# Altium PCB PCB1.PcbDoc (part 3 of 3)
Units mil, origin at the board's own origin, x right, y up, seen from the top; angles counter-clockwise.
Board outline 1649.96 x 1854.5 mil, 6 copper layers (Top Layer, Layer 2, Layer 3, Layer 4, Layer 5, Bottom Layer), stack 32.112 mil thick; 86 components, 196 nets, 681 pads, 452 vias.
Unrouted connection lines stored in the file: 66.
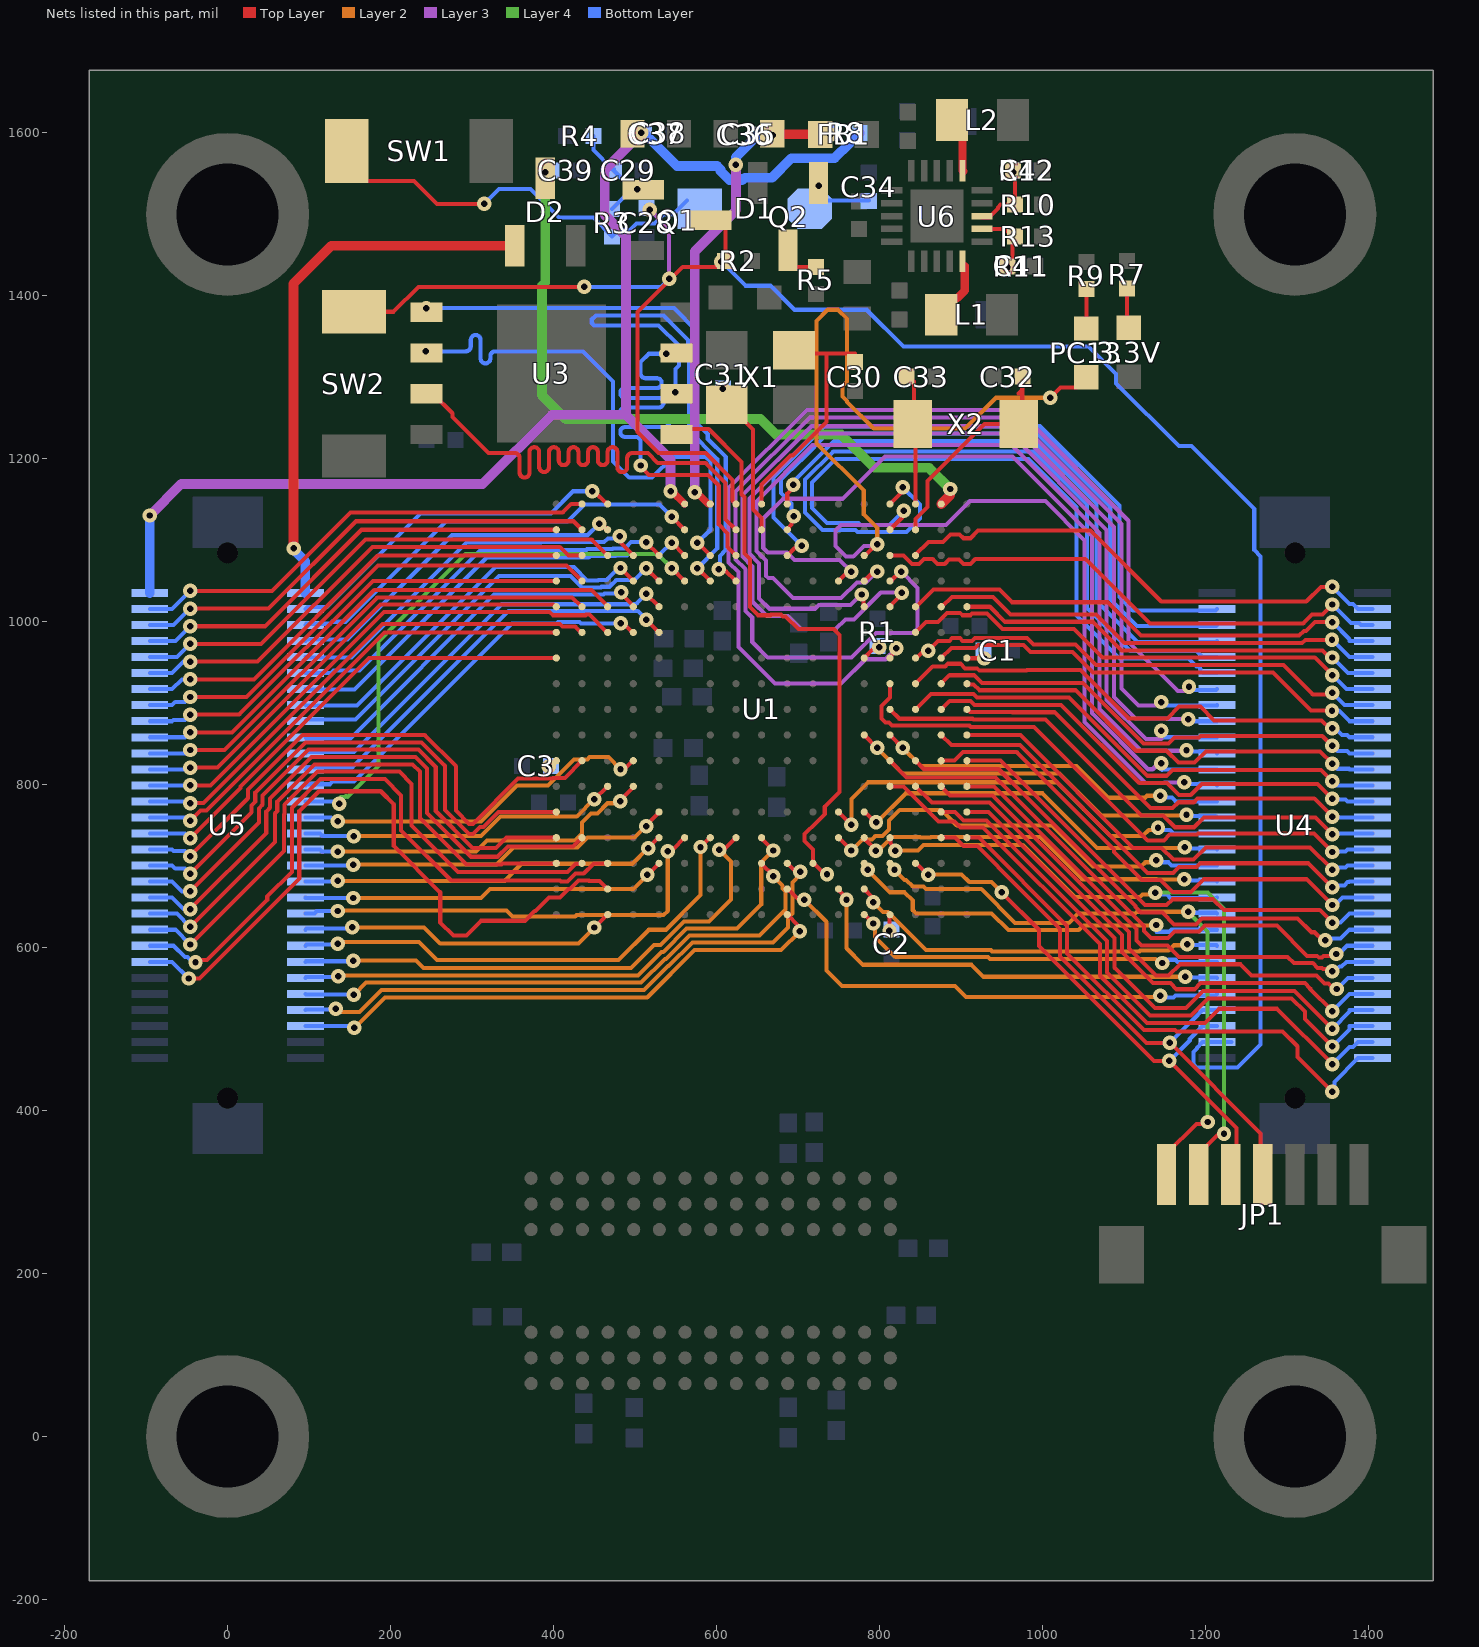
[diagram p7: the nets of this part, all layers, seen from the top]

## Via types
v1: diameter 17.7, hole 7.9, Top Layer to Bottom Layer, tented both sides, 452 vias

## Nets (pads, with @x,y where several pads share a name; then routed paths per layer and width w, separated by ;. In a path a pad name is that pad's centre, name@x,y a point inside that pad or via, vN(x,y) a via of type N, cw(c..) or ccw(c..) an arc to the next point about the centre after c; other vN are vias at no path point) (continued)
"LED / PC13": PC13.2 U1.E3 U4.35 | length 1655.8
  Top Layer w5: U1.E3@781.46,1081.47 782.51,1081.47 796.19,1095.15 v1(797.46,1095.15) ; v1(1010,1275) 1022.5,1287.5 1041.5,1287.5 PC13.2@1054,1300
  Layer 3 w5: v1(797.46,1095.15) 795.42,1093.11 781.11,1093.11 768,1080 759.24,1080 746,1093.24 746,1112 752.79,1118.79 881.79,1118.79 911,1148 1004,1148 1052,1100 1052,876.78 1126.78,802 1149.03,802 1149.88,802.85 v1(1174,802.85)
  Layer 2 w5: v1(797.46,1095.15) 797.46,1114.88 780.87,1131.47 780.87,1161.13 723,1219 723,1369.38 736.62,1383 749.34,1383 760.17,1372.17 760.17,1294.88 754.65,1289.36 754.65,1276.64 760.17,1271.12 760.17,1269.96 793.13,1237 905,1237 943,1275 v1(1010,1275)
  Bottom Layer w5: v1(1174,802.85) 1175.82,801.03 1212.71,801.03 U4.35@1214.54,799.2
NetC1_2: C1.2 U1.A7 | length 21.7
  Top Layer w5: U1.A7@907.45,955.49 907.72,955.22 928.63,955.22 v1(928.9,954.95)
NetC2_2: C2.2 U1.D17 | length 20.2
  Top Layer w5: v1(812.41,620.59) 812.69,620.86 812.69,640.25 U1.D17@812.96,640.53
NetC3_2: C3.2 U1.U11 | length 12.5
  Top Layer w5: v1(393.99,822.35) 395.31,822.35 402.47,829.5 U1.U11@403.51,829.5
NetC29_1: C29.1 Q1.1 R3.2 R4.2 | length 128.8
  Bottom Layer w5: R4.2@449,1596 449,1579 472,1556 C29.1@474,1556 ; R3.2@472,1506.46 496.54,1531 v1@502,1531 ; C29.1@474,1554 494.57,1533.43 500.57,1533.43 v1@502,1532
  other v1: 502.61,1531
NetC34_1: C34.1 D1.2 Q2.1 | length 66.5
  Top Layer w5: v1(725.4,1535.4) Q2.1@725.4,1538.68
  Bottom Layer w5: D1.2@721,1531 v1(725.4,1535.4) ; D1.2@730,1517 C34.1@787,1517
NetC41_1: C41.1 R11.2 R13.1 U6.2 | length 83.8
  Top Layer w5: U6.2@926.03,1482.25 954.02,1482.25 R13.1@962.27,1474 ; v1(957.27,1435.27) R11.2@957.27,1436 ; R11.2@957.63,1435.63 963.27,1441.27 R13.1@963.27,1473 ; R13.1@965.27,1474 R13.1@969,1474
NetC42_1: C42.1 R10.1 R12.2 U6.3 | length 97.2
  Top Layer w5: U6.3@926,1496 934.5,1496 945.62,1507.12 945.62,1508.7 948.93,1512 R10.1@966.27,1512 C42.1@966.27,1556.73 ; C42.1@963,1558 C42.1@966.27,1554.73
  other v1: 964.27,1551.73
NetD1_1: D1.1 R3.1 SW1.2 | length 501.7
  Top Layer w5: SW1.2@146.41,1578 146.41,1565.2 170.49,1541.13 228.68,1541.13 256.81,1513 v1(315,1513)
  Bottom Layer w5: v1(315,1513) 333,1531 372,1531 407,1496 449,1496 R3.1@472,1473 479.34,1480.34 493.18,1480.34 501.84,1489 524.16,1489 535,1499.84 546.84,1499.84 D1.1@564,1517
NetL1_2: L1.2 U6.20 | length 74.7
  Top Layer w10: L1.2@876,1377 876,1382.91 890.69,1397.59 895.92,1397.59 904.91,1406.57 U6.20@904.91,1436.67
NetL2_2: L2.2 U6.6 | length 62
  Top Layer w10: L2.2@888.6,1609 902.11,1595.49 902.11,1553.89 U6.6@903,1553
NetLED2_1: 3.3V.1 R7.2 | length 49.1
  Top Layer w5: R7.2@1104,1409.27 1104,1363 3.3V.1@1106,1361
NetLED3_1: PC13.1 R9.2 | length 48.3
  Top Layer w5: PC13.1@1054,1360 R9.2@1054,1408.27
NetQ2_3: Q2.3 R5.1 | length 43.4
  Top Layer w5: Q2.3@689,1451 689,1444.04 697.31,1435.73 R5.1@722,1435.73
NetR1_2: R1.2 U1.E7 | length 23.9
  Top Layer w5: U1.E7@781.46,955.49 792.48,966.5 797.32,966.5 v1(799.75,968.93)
OS_25M_IN: C31.2 U1.J2 X1.3 | length 189.4
  Top Layer w5: X1.3@602,1280 X1.3@613,1269 ; X1.3@607,1285 v1(608,1286) ; X1.3@613,1266.54 614.63,1266.54 645.05,1236.11 645.05,1138.02 655.48,1127.59 U1.J2@655.48,1112.97
  Bottom Layer w5: v1(608,1286) C31.2@608,1286.28
OS_25M_OUT: C30.2 U1.J1 X1.1 | length 296.2
  Top Layer w5: U1.J1@655.48,1144.46 655.48,1168.48 690.94,1203.94 693.97,1203.94 735,1244.96 735,1329.17 734.63,1329.54 ; X1.1@695.34,1333.46 699.26,1329.54 734.63,1329.54 ; 770,1329.54 734.63,1329.54
OS_32K_IN: C32.1 U1.C2 X2.2 | length 274.9
  Top Layer w5: U1.C2@844.46,1112.97 844.46,1126.23 859,1140.78 859,1173 929,1243 X2.2@970.96,1243 ; 970.96,1280.45 975.43,1284.92 ; X2.2@974,1240 975.43,1241.43 975.43,1284.92 ; C32.1@975.43,1301 975.43,1284.92
OS_32K_OUT: C33.1 U1.C1 X2.1 | length 147
  Top Layer w5: X2.1@835.46,1248.58 X2.1@841.04,1243 844.46,1239.58 U1.C1@844.46,1144.46 ; X2.1@842,1256 842.28,1256.28 C33.1@842.28,1295
PA0: U1.N5 U5.40 | length 521.6
  Top Layer w5: v1(513.75,1034.23) U1.N5@529.5,1018.48
  Bottom Layer w5: U5.40@95.47,838.57 96.9,840 155,840 336.5,1021.5 500.48,1021.5 501.65,1022.67 502.19,1022.67 v1(513.75,1034.23)
PA0_C: U1.T1 U5.57 | length 583.9
  Top Layer w5: v1(-46,1037.9) 54.67,1037.9 150.8,1134.04 411.36,1134.04 421.79,1144.46 U1.T1@435.01,1144.46
  Bottom Layer w5: U5.57@-95.46,1015.74 -68,1015.74 -68,1015.91 v1(-46,1037.9)
PA1: U1.N4 U5.44 | length 529.8
  Top Layer w5: v1(513.75,1065.72) U1.N4@529.5,1049.98
  Bottom Layer w5: U5.44@95.47,877.94 97.53,880 157,880 333,1056 421,1056 434.79,1042.21 458.16,1042.21 458.96,1043 468.89,1043 477.09,1051.2 499.22,1051.2 v1(513.75,1065.72)
PA1_C: U1.T2 U5.55 | length 587.5
  Top Layer w5: v1(-46,1016.2) 50.18,1016.2 157.38,1123.4 424.58,1123.4 U1.T2@435.01,1112.97
  Bottom Layer w5: U5.55@-95.46,996.05 -66.16,996.05 v1(-46,1016.2)
PA2: U1.N3 U5.50 | length 507.8
  Top Layer w5: v1(513.75,1097.85) 513.75,1097.54 529.5,1081.79 U1.N3@529.5,1081.47
  Bottom Layer w5: U5.50@95.47,937 127,937 130,940 162,940 310.22,1088.22 440.29,1088.22 441.29,1089.22 472.4,1089.22 473.04,1089.86 486.95,1089.86 488.59,1091.5 488.89,1091.5 495.24,1097.85 v1(513.75,1097.85)
PA3: U1.U2 U5.53 | length 555.6
  Top Layer w5: v1(-46,994.5) 45.7,994.5 164.16,1112.97 U1.U2@403.51,1112.97
  Bottom Layer w5: U5.53@-95.46,976.37 -64.14,976.37 v1(-46,994.5)
PA4: U1.U3 U5.47 | length 567
  Top Layer w5: v1(-46,929.4) 32.24,929.4 184.31,1081.47 U1.U3@403.51,1081.47
  Bottom Layer w5: U5.47@-95.46,917.31 -68,917.31 -55.91,929.4 v1(-46,929.4)
PA5: U1.T3 U5.49 | length 599
  Top Layer w5: v1(-46,951.1) 36.72,951.1 177.62,1092 407.73,1092 418.26,1081.47 U1.T3@435.01,1081.47
  Bottom Layer w5: U5.49@-95.46,937 -68,937 -53.89,951.1 v1(-46,951.1)
PA6: U1.R3 U5.51 | length 629.8
  Top Layer w5: v1(-46,972.8) 41.21,972.8 169.41,1101 446.98,1101 U1.R3@466.5,1081.47
  Bottom Layer w5: U5.51@-95.46,956.68 -62.13,956.68 v1(-46,972.8)
PA7: U1.R5 U5.41 | length 645.8
  Top Layer w5: v1(-46,864.3) 5.32,864.3 180.02,1039 446.74,1039 466.5,1019.23 U1.R5@466.5,1018.48
  Bottom Layer w5: U5.41@-95.46,858.26 -52.04,858.26 v1(-46,864.3)
PA8: U1.E15 U4.17 | length 488.3
  Top Layer w5: U1.E15@781.46,703.52 781.46,702.48 785.58,698.36 v1(785.58,695.57)
  Layer 2 w5: v1(785.58,695.57) 813.16,668 831,668 841.04,657.96 841.04,645.96 845,642 897.87,642 898.07,642.2 937.8,642.2 958.5,621.5 981.43,621.5 1044.76,621.5 1050.31,627.05 1139.2,627.05 v1(1140,627.85)
  Bottom Layer w5: v1(1140,627.85) 1140,619.75 1140.21,619.54 1156.35,619.54 1158.85,622.04 U4.17@1214.53,622.04
PA9: JP1.7 U1.D15 U4.19 | length 799.9
  Top Layer w5: U1.D15@812.96,703.52 812.96,702.48 818.58,696.85 v1(818.58,695.57) ; JP1.7@1152.58,321.48 1152.58,347.08 1189.08,383.57 1200.57,383.57 v1(1203,386)
  Layer 4 w5: v1(1179,644.05) 1203,620.05 v1(1203,386)
  Layer 2 w5: v1(818.58,695.57) 830.94,683.21 832.81,683.21 841.02,675 853.95,675 857.05,671.9 925.1,671.9 966.5,630.5 1032.5,630.5 1044,642 1114,642 1116.05,644.05 v1(1179,644.05)
  Bottom Layer w5: v1(1179,644.05) 1180.16,642.89 1213.37,642.89 U4.19@1214.53,641.72
PA10: JP1.6 U1.D14 U4.21 | length 865.2
  Top Layer w5: U1.D14@812.96,735.02 813.7,734.28 813.7,728.13 819.36,722.47 v1(819.36,719.03) ; JP1.6@1189.22,341.22 1189.22,344.34 1214.18,369.3 1220.57,369.3 v1(1223,371.73)
  Layer 4 w5: v1(1138.7,667.55) 1202.85,667.55 1223,647.4 v1(1223,371.73)
  Layer 2 w5: v1(819.36,719.03) 847.29,719.03 854.16,725.9 867.14,725.9 867.24,726 976,726 1040,662 1119.85,662 1122.97,665.12 1136.27,665.12 v1(1138.7,667.55)
  Bottom Layer w5: v1(1138.7,667.55) 1141.13,665.12 1153.08,665.12 1157.55,660.65 1213.78,660.65 U4.21@1214.53,661.4
PA11: U1.E17 U4.13 | length 468.7
  Top Layer w5: U1.E17@781.46,640.53 U1.E17@781.46,640.53 792.41,629.68 v1(792.5,629.68)
  Layer 2 w5: v1(792.5,629.68) 794.67,627.5 794.67,613.33 819.5,588.5 933.5,588.5 935.96,586.04 981.43,586.04 1139.01,586.04 1143.9,581.15 v1(1147.34,581.15)
  Bottom Layer w5: v1(1147.34,581.15) 1150.77,581.15 1154.79,585.17 1163.69,585.17 1166.19,582.67 U4.13@1214.53,582.67
PA12: U1.E16 U4.15 | length 472.1
  Top Layer w5: U1.E16@781.46,672.02 790.6,662.89 790.6,657.68 v1(792.7,655.57)
  Layer 2 w5: v1(792.7,655.57) 804.7,643.57 810.43,643.57 857,597 937.02,597 938.52,595.5 981.43,595.5 1119.18,595.5 1120.18,596.5 1155.18,596.5 1161.65,602.97 1176.82,602.97 v1(1178,604.15)
  Bottom Layer w5: v1(1178,604.15) 1178.9,603.25 1213.63,603.25 U4.15@1214.53,602.35
PA15: U1.A14 U4.2 | length 677.7
  Top Layer w5: U1.A14@907.45,735.02 922.28,735.02 1030.51,626.79 1030.51,592.95 1124.76,498.7 1163,498.7 1164.71,497 1295,497 1313,479 1313,465.99 v1(1356,422.99)
  Bottom Layer w5: v1(1356,422.99) 1358.43,425.42 1358.43,435.23 1387.75,464.56 U4.2@1405.47,464.56
PB0: U1.U5 U5.37 | length 583.7
  Top Layer w5: v1(-46,820.9) -12.62,820.9 187.48,1021 399.95,1021 402.47,1018.48 U1.U5@403.51,1018.48
  Bottom Layer w5: U5.37@-95.46,818.89 -48.01,818.89 v1(-46,820.9)
PB1: U1.T5 U5.39 | length 614.5
  Top Layer w5: v1(-46,842.6) -3.65,842.6 183.75,1030 422.62,1030 434.14,1018.48 U1.T5@435.01,1018.48
  Bottom Layer w5: U5.39@-95.46,838.57 -50.03,838.57 v1(-46,842.6)
PB2: U1.R6 U5.35 | length 661
  Top Layer w5: v1(-46,799.2) -20.81,799.2 191.99,1012 395.24,1012 399.19,1008.05 439.33,1008.05 440,1008.72 444.14,1008.72 465.88,986.98 U1.R6@466.5,986.98
  Bottom Layer w5: U5.35@-95.46,799.2 v1(-46,799.2)
PB3: U1.C6 U4.48 | length 611.4
  Top Layer w5: U1.C6@844.46,986.98 857.28,999.81 872.03,999.81 883.22,1011 899,1011 901.95,1008.05 911.77,1008.05 913.72,1010 931.98,1010 950.98,991 1038.73,991 1073.73,956 1334.44,956 v1(1356,934.44)
  Bottom Layer w5: v1(1356,934.44) 1373.14,917.31 U4.48@1405.47,917.31
PB4: U1.B7 U4.44 | length 575.1
  Top Layer w5: U1.B7@875.95,955.49 888.52,968.06 917.2,968.06 920.85,971.7 976.97,971.7 985.67,963 1037.27,963 1062.27,938 1283.04,938 1330,891.04 v1(1355.59,891.04)
  Bottom Layer w5: v1(1355.59,891.04) 1363.9,891.04 1377,877.94 U4.44@1405.47,877.94
PB5: U1.A5 U4.50 | length 531.8
  Top Layer w5: U1.A5@907.45,1018.48 909.21,1018.48 935.5,1018.5 954,1000 1062.27,1000 1097.27,965 1343.71,965 1352.57,956.14 v1(1356,956.14)
  Bottom Layer w5: v1(1356,956.14) 1375.15,937 U4.50@1405.47,937
PB6: U1.B5 U4.52 | length 568.3
  Top Layer w5: U1.B5@875.95,1018.48 877,1018.48 889.02,1030.5 939.5,1030.5 961,1009 1066,1009 1101,974 1319,974 1322.84,977.84 v1(1355.59,977.84)
  Bottom Layer w5: v1(1355.59,977.84) 1356.02,977.84 1371.35,962.5 1377.17,956.68 U4.52@1405.47,956.68
PB7: U1.C5 U4.54 | length 610.9
  Top Layer w5: U1.C5@844.46,1018.48 845.5,1018.48 866.57,1039.55 947.45,1039.55 963,1024 1080,1024 1121,983 1315.27,983 1321.04,988.77 1323.77,988.77 1334.54,999.54 v1(1356,999.54)
  Bottom Layer w5: v1(1356,999.54) 1377,978.55 1377,976.37 U4.54@1405.47,976.37
PB8: U1.D5 U4.43 | length 1265.8
  Top Layer w5: U1.D5@812.96,1018.48 812.96,1019.52 827.68,1034.24 v1(827.68,1035.73)
  Layer 3 w5: v1(827.68,1035.73) 801.73,1035.73 769,1003 758.39,1003 746.36,990.96 704.04,990.96 688.1,1006.9 662.1,1006.9 644,1025 644,1068.04 632,1080.04 632,1155.54 716.46,1240 964.54,1240 1088,1116.54 1088,907.78 1114.38,881.4 1152.36,881.4 1153.06,880.7 1178.7,880.7 v1(1179,880.4)
  Bottom Layer w5: v1(1179,880.4) 1179,879 1180.06,877.94 U4.43@1214.54,877.94
PB9: U1.D4 U4.45 | length 1418.5
  Top Layer w5: U1.D4@812.96,1049.98 814,1049.98 825.71,1061.68 v1(827,1061.68)
  Layer 3 w5: v1(827,1061.68) 847,1041.68 847,992 841,986 795.82,986 765.82,956 663,956 644,975 644,1005 635.5,1013.5 635.5,1064.52 623.5,1076.52 623.5,1159.77 714.73,1251 966.27,1251 1097,1120.27 1097,918 1118,897 1145.81,897 1145.81,897.7 1145.81,898.1 v1(1145.81,901.5)
  Bottom Layer w5: v1(1145.81,901.5) 1145.81,898.1 1145.81,897.7 1145.81,897.63 1146.12,897.31 1214.22,897.31 U4.45@1214.54,897.63
PB10: U1.P11 U5.32 | length 447.7
  Top Layer w5: v1(482.25,818.96) 484.68,821.39 489.24,821.39 497.36,829.5 U1.P11@498,829.5
  Layer 2 w5: v1(135,755) 311,755 355,799 393.08,799 425.08,831 441.57,831 444.38,833.81 467.4,833.81 v1(482.25,818.96)
  Bottom Layer w5: U5.32@95.47,759.83 126.73,759.83 131.56,755 v1(135,755)
PB11: U1.P12 U5.28 | length 446.3
  Top Layer w5: v1(482.16,779.6) 482.16,781.12 498,796.96 U1.P12@498,798.01
  Layer 2 w5: v1(135,718) 305,718 318.3,731.3 426.15,731.3 434.85,740 434.85,753.85 445.85,764.85 453.85,764.85 466.27,777.27 479.82,777.27 v1(482.16,779.6)
  Bottom Layer w5: U5.28@95.47,720.46 113.19,720.46 115.61,718.04 118.5,718.04 118.54,718 v1(135,718)
PB12: U1.T14 U5.21 | length 728
  Top Layer w5: v1(-46,647.3) 47.48,740.78 47.48,767.21 52,771.73 52,782.91 103.09,834 230.8,834 245,819.8 245,765.37 298.78,711.59 331.59,711.59 344,724 423.99,724 U1.T14@435.01,735.02
  Bottom Layer w5: U5.21@-95.47,661.4 -67.99,661.41 -53.89,647.3 v1(-46,647.3)
PB13: U1.U14 U5.23 | length 680
  Top Layer w5: v1(-46,669) 38.48,753.48 38.48,770.94 43,775.46 43,786.64 99.36,843 234.53,843 255.52,822.01 255.52,767.58 300.84,722.26 329.54,722.26 342.29,735.02 U1.U14@403.51,735.02
  Bottom Layer w5: U5.23@-95.46,681.09 -67.99,681.09 -55.9,669 v1(-46,669)
PB14: U1.U15 U5.19 | length 700.4
  Top Layer w5: v1(-46,625.6) 58,729.59 58,765 61,768 61,779.18 106.82,825 227.07,825 236,816.07 236,759.09 293,702.09 336.09,702.09 337.52,703.52 U1.U15@403.51,703.52
  Bottom Layer w5: U5.19@-95.47,641.72 -62.13,641.72 v1(-46,625.6)
PB15: U1.T15 U5.17 | length 744
  Top Layer w5: v1(-46,603.9) -45.1,603.9 -45.1,604.79 69,718.89 69,763.27 70,764.27 70,775.46 110.54,816 211,816 226,801 226,750 282.91,693.09 417.28,693.09 426.98,702.78 434.27,702.78 U1.T15@435.01,703.52
  Bottom Layer w5: U5.17@-95.47,622.04 -64.15,622.04 v1(-46,603.9)
PC1: U1.M2 U5.56 | length 539.7
  Top Layer w5: v1(545.24,1128.72) U1.M2@560.99,1112.97
  Bottom Layer w5: U5.56@95.47,996.05 97.03,997.61 125.61,997.61 128,1000 145,1000 268,1123 417,1123 438,1144 529.96,1144 v1(545.24,1128.72)
PC2: U1.M3 U5.48 | length 546.8
  Top Layer w5: v1(545.24,1097.22) U1.M3@560.99,1081.47
  Bottom Layer w5: U5.48@95.47,917.31 95.78,917 156,917 318.22,1079.22 443.31,1079.22 444.81,1080.72 475.92,1080.72 476.31,1081.11 490.22,1081.11 492.11,1083 531.02,1083 v1(545.24,1097.22)
PC2_C: U1.R1 U5.58 | length 437.4
  Top Layer w5: v1(447.75,1160.21) 449.71,1160.21 465.46,1144.46 U1.R1@466.5,1144.46
  Bottom Layer w5: U5.58@95.47,1015.74 97.89,1018.16 122.16,1018.16 237,1133 397,1133 424.21,1160.21 v1(447.75,1160.21)
PC3: U1.M4 U5.34 | length 701.6
  Top Layer w5: v1(545.24,1065.72) U1.M4@560.99,1049.98
  Layer 4 w5: v1(136.81,776.65) 139.24,779.08 139.24,785.08 144.25,785.08 145.29,786.12 ; v1(545.24,1065.72) 527.97,1083 292,1083 185,976 185,823 147.04,785.04 145.67,786.42 145.33,786.08 ; 145.29,786.12 145.33,786.08
  Bottom Layer w5: U5.34@95.47,779.52 130.51,779.52 133.38,776.65 v1(136.81,776.65)
PC3_C: U1.R2 U5.54 | length 433.6
  Top Layer w5: v1(456,1120.21) 458.22,1120.21 465.46,1112.97 U1.R2@466.5,1112.97
  Bottom Layer w5: U5.54@95.47,976.37 97.1,978 147,978 275.22,1106.22 442.01,1106.22 v1(456,1120.21)
PC4: U1.T4 U5.45 | length 609.3
  Top Layer w5: v1(-46,907.7) 23.27,907.7 184.57,1069 415.98,1069 U1.T4@435.01,1049.98
  Bottom Layer w5: U5.45@-95.46,897.63 -68,897.63 -64.27,901.35 -52.35,901.35 v1(-46,907.7)
PC5: U1.U4 U5.43 | length 570.2
  Top Layer w5: v1(-46,886) 14.29,886 178.27,1049.98 U1.U4@403.51,1049.98
  Bottom Layer w5: U5.43@-95.46,877.94 -68,877.94 -66.29,879.65 -52.35,879.65 v1(-46,886)
PC6: U1.F14 U4.25 | length 532.7
  Top Layer w5: U1.F14@749.97,735.02 v1(765.72,719.27)
  Layer 2 w5: v1(765.72,719.27) 779.45,733 791,733 795,737 804,737 812,745 812,756 825,769 876,769 895,750 1012,750 1062.4,699.6 1121.15,699.6 1126.37,704.82 1137.57,704.82 v1(1140,707.25)
  Bottom Layer w5: v1(1140,707.25) 1142.43,704.82 1154.81,704.82 1158.85,700.78 U4.25@1214.54,700.78
PC7: U1.F13 U4.29 | length 545.7
  Top Layer w5: U1.F13@749.97,766.51 v1(765.72,750.76)
  Layer 2 w5: v1(765.72,750.76) 765.72,782.72 786,803 1018,803 1084,737 1123.15,737 1130.67,744.52 1139.57,744.52 v1(1142,746.95)
  Bottom Layer w5: v1(1142,746.95) 1144.43,744.52 1156.48,744.52 1160.85,740.15 U4.29@1214.54,740.15
PC8: U1.E13 U4.27 | length 482.4
  Top Layer w5: U1.E13@781.46,766.51 782.35,766.51 795.05,753.81 v1(795.93,753.81)
  Layer 2 w5: v1(795.93,753.81) 796.72,753.81 832.41,789.5 1000.5,789.5 1067.4,722.6 1174.15,722.6 v1(1175,723.45)
  Bottom Layer w5: v1(1175,723.45) 1176.49,721.96 1213.04,721.96 U4.27@1214.54,720.46
PC9: U1.E14 U4.23 | length 471.2
  Top Layer w5: U1.E14@781.46,735.02 781.46,734.14 795.79,719.82 v1(795.79,718.94)
  Layer 2 w5: v1(795.79,718.94) 798.28,718.94 815.33,736 849.71,736 850.51,735.2 862.82,735.2 863.62,736 981.43,736 997,736 1049,684 1140.22,684 1140.47,683.75 v1(1174.27,683.75)
  Bottom Layer w5: v1(1174.27,683.75) 1175.6,682.42 1213.21,682.42 U4.23@1214.54,681.09
PC10: U1.A13 U4.8 | length 657.8
  Top Layer w5: U1.A13@907.45,766.51 933.91,766.51 1088.65,611.77 1088.65,575.4 1138.34,525.7 1176.14,525.7 1197.09,546.65 1309.79,546.65 v1(1356,500.44)
  Bottom Layer w5: v1(1356,500.44) 1377,521.43 1377,523.61 U4.8@1405.47,523.61
PC11: U1.B13 U4.6 | length 706.9
  Top Layer w5: U1.B13@875.95,766.51 892.7,766.51 903.13,756.08 931.61,756.08 1079.65,608.04 1079.65,569.27 1132.21,516.7 1182.47,516.7 1203.42,537.65 1306.06,537.65 1322.22,521.5 1322.22,512.52 v1(1356,478.74)
  Bottom Layer w5: v1(1356,478.74) 1377,499.73 1377,503.93 U4.6@1405.47,503.93
PC12: U1.C12 U4.10 | length 703.2
  Top Layer w5: U1.C12@844.46,798.01 864.46,778 935.15,778 1097.65,615.5 1097.65,594.55 1135.8,556.4 1157.48,556.4 1164.95,548.93 1186.64,548.93 1194.35,556.64 1322.22,556.64 1328.88,549.98 1328.88,549.27 v1(1356,522.14)
  Bottom Layer w5: v1(1356,522.14) 1377,543.13 1377,543.3 U4.10@1405.47,543.3
PD2: U1.D12 U4.4 | length 782.1
  Top Layer w5: U1.D12@812.96,798.01 829.71,798.01 872.72,755 892.19,755 899.61,747.58 927.38,747.58 1070.65,604.31 1070.65,565.54 1128.48,507.7 1199.69,507.7 1216.99,525 1288.04,525 v1(1356,457.04)
  Bottom Layer w5: v1(1356,457.04) 1377,478.03 1381.54,478.03 1387.75,484.24 U4.4@1405.47,484.24
PD3: U1.B12 U4.12 | length 661.5
  Top Layer w5: U1.B12@875.95,798.01 886.96,787 938.88,787 1106.65,619.23 1106.65,598.98 1139.83,565.8 1155.17,565.8 1169,579.63 1243.19,579.63 1257.02,565.8 1331.2,565.8 1331.36,565.64 1336.8,565.64 1346.61,555.83 1351.44,555.83 1358,549.27 v1(1361.43,549.27)
  Bottom Layer w5: v1(1361.43,549.27) 1375.15,562.98 U4.12@1405.47,562.98
PD4: U1.A12 U4.14 | length 605
  Top Layer w5: U1.A12@907.45,798.01 940.6,798.01 1115.65,622.95 1115.65,608.91 1121.86,602.7 1153.7,602.7 1167.6,588.8 1301.2,588.8 1309,581 1332,581 1337.96,575.04 1343.07,575.04 1344.5,573.61 1353.47,573.61 v1(1355.9,571.18)
  Bottom Layer w5: v1(1355.9,571.18) 1359.33,571.18 1365.07,576.92 1367.39,576.92 1373.14,582.67 U4.14@1405.47,582.67
PD5: U1.A11 U4.20 | length 590.9
  Top Layer w5: U1.A11@907.45,829.5 948.79,829.5 1126.09,652.2 1152.6,652.2 1159.8,659.4 1209.65,659.4 1223,646.05 1340.59,646.05 v1(1356,630.64)
  Bottom Layer w5: v1(1356,630.64) 1365.92,630.64 1377,641.72 U4.20@1405.47,641.72
PD6: U1.B11 U4.22 | length 630.2
  Top Layer w5: U1.B11@875.95,829.5 892.32,829.5 902.75,839.93 968.61,839.93 1087.86,720.68 1087.86,717.3 1122.26,682.9 1145.21,682.9 1159.71,668.4 1182.66,668.4 1198.26,684 1324.34,684 v1(1356,652.34)
  Bottom Layer w5: v1(1356,652.34) 1359.44,652.34 1368.5,661.41 U4.22@1405.47,661.41
PD7: U1.C11 U4.18 | length 664.5
  Top Layer w5: U1.C11@844.46,829.5 854.96,819 946.56,819 981.43,784.14 1114.25,651.32 1114.25,649.81 1120.86,643.2 1147.38,643.2 1161.88,628.7 1188.41,628.7 1195.71,636 1313.47,636 1330.53,618.94 1334.2,618.94 1343.97,609.16 v1(1347.41,609.16)
  Bottom Layer w5: v1(1347.41,609.16) 1349.54,611.29 1366.26,611.29 1377,622.04 U4.18@1405.47,622.04
PD11: U1.R15 U5.15 | length 798.8
  Top Layer w5: v1(-39.36,582.2) -36.93,584.63 -25.1,584.63 48.67,658.4 48.67,662.67 79,693 79,771.73 114.27,807 193,807 213,787 213,744 274.55,682.45 407.83,682.45 409.28,681 417.21,681 427.17,690.95 437.19,690.95 449.76,703.52 U1.R15@466.5,703.52
  Bottom Layer w5: U5.15@-95.47,602.35 -66.16,602.35 -52.36,588.55 -49.15,588.55 -42.8,582.2 v1(-39.36,582.2)
PD12: U1.R16 U5.13 | length 871.5
  Top Layer w5: v1(-47.65,562.15) -47.49,562.31 -34.69,562.31 88,685 88,768 112,792 188,792 204,776 204,725 261,668 261,631 277.05,614.95 293.15,614.95 311.2,633 365,633 377,645 377.79,645 394.38,661.59 407.83,661.59 418.26,672.02 420.26,672.02 430.69,682.45 443.38,682.45 443.83,682 456.53,682 U1.R16@466.5,672.02
  Bottom Layer w5: U5.13@-95.47,582.67 -68.18,582.67 v1(-47.65,562.15)
PD13: U1.R17 U5.18 | length 395.3
  Top Layer w5: v1(450.3,624.78) 450.53,624.78 466.28,640.53 U1.R17@466.5,640.53
  Layer 2 w5: v1(153,625) 241,625 261,605 430.53,605 v1(450.3,624.78)
  Bottom Layer w5: U5.18@95.47,622.04 96.95,623.52 151.52,623.52 v1(153,625)
PE2: U1.C3 U4.58 | length 632.7
  Top Layer w5: U1.C3@844.46,1081.47 844.46,1082.31 860.2,1098.06 878.01,1098.06 887.09,1107.14 898.53,1107.14 903.13,1102.54 911.77,1102.54 921.23,1112 1059,1112 1146,1025 1324,1025 1341.94,1042.94 v1(1356,1042.94)
  Bottom Layer w5: v1(1356,1042.94) 1377,1021.95 1381.54,1021.95 1387.75,1015.74 U4.58@1405.47,1015.74
PE3: U1.D3 U4.56 | length 661.6
  Top Layer w5: U1.D3@812.96,1081.47 829.71,1081.47 840.14,1071.04 848.78,1071.04 854.89,1077.15 865.52,1077.15 871.63,1071.04 880.27,1071.04 885.6,1076.37 897.8,1076.37 903.13,1071.04 911.77,1071.04 917.73,1077 1053,1077 1132,998 1320.27,998 1331.27,1009 1343.75,1009 v1(1356,1021.24)
  Bottom Layer w5: v1(1356,1021.24) 1378.77,998.47 1388.81,998.47 1391.24,996.05 U4.56@1405.47,996.05
PE4: U1.D2 U4.49 | length 887.4
  Top Layer w5: U1.D2@812.96,1112.97 827.48,1127.49 827.48,1133.67 v1(829.91,1136.1)
  Bottom Layer w5: v1(829.91,1136.1) 812.6,1118.79 776.86,1118.79 774.48,1121.16 735.84,1121.16 717.5,1139.5 717.5,1171.03 746.47,1200 983,1200 1042.07,1140.93 1042.07,1007.93 1095,955 1179.47,955 1189.21,945.26 1191.47,945.26 1194.4,942.33 1194.4,939.42 1196.82,937 U4.49@1214.54,937
PE5: U1.D1 U4.51 | length 970.9
  Top Layer w5: U1.D1@812.96,1144.46 826.6,1158.11 826.6,1162.9 v1(828.71,1165)
  Bottom Layer w5: v1(828.71,1165) 850,1143.71 850,1127 833.29,1110.29 773.33,1110.29 770.96,1112.66 730.34,1112.66 709,1134 709,1174.55 743.45,1209 990,1209 1055,1144 1055,1017 1108,964 1189.5,964 1196.82,956.68 U4.51@1214.54,956.68
PE6: U1.E5 U4.41 | length 1184.9
  Top Layer w5: v1(778.47,1033.47) 780.73,1031.21 780.73,1019.22 U1.E5@781.46,1018.48
  Layer 3 w5: v1(778.47,1033.47) 777.42,1033.47 764.61,1020.66 725.66,1020.66 721,1016 665.02,1016 652.5,1028.52 652.5,1071.56 640.5,1083.56 640.5,1151.32 720.18,1231 960.82,1231 1079,1112.82 1079,904.05 1127.05,856 1146,856 v1(1146,866.05)
  Bottom Layer w5: v1(1146,866.05) 1146.2,865.85 1146.2,858.2 1146.26,858.26 U4.41@1214.54,858.26
PG2: U1.H16 U4.9 | length 620.7
  Top Layer w5: U1.H16@686.98,672.02 688.02,672.02 700.07,659.97 706.84,659.97 v1(708.05,658.76)
  Layer 2 w5: v1(708.05,658.76) 735,631.81 735,572 754,553 893,553 906.4,539.6 1143.25,539.6 v1(1144.7,541.05)
  Bottom Layer w5: v1(1144.7,541.05) 1146.81,538.95 1161.05,538.95 1163.55,541.45 1212.68,541.45 U4.9@1214.53,543.3
PG3: U1.H15 U5.8 | length 732
  Top Layer w5: U1.H15@686.98,703.52 695.43,695.1 700.62,695.1 v1(702.72,693)
  Layer 2 w5: v1(133,525) 137,521 162,521 189,548 511.38,548 540.63,577.25 541.33,577.25 570.58,606.5 669.5,606.5 688,625 688,636.98 693.2,642.18 693.2,680.04 702.72,689.56 v1(702.72,693)
  Bottom Layer w5: U5.8@95.47,523.61 96.16,524.31 132.31,524.31 v1(133,525)
PG7: U1.F16 U4.11 | length 546.6
  Top Layer w5: U1.F16@749.97,672.02 749.97,670.98 759.7,661.25 v1(759.7,658.91)
  Layer 2 w5: v1(759.7,658.91) 759.7,599.3 780,579 913,579 927.72,564.28 v1(1175.36,564.28)
  Bottom Layer w5: v1(1175.36,564.28) 1176.01,563.63 1213.88,563.63 U4.11@1214.53,562.98
PG9: U1.A10 U4.26 | length 580.9
  Top Layer w5: U1.A10@907.45,861 973,861 1111.4,722.6 1146.36,722.6 1160.86,708.1 1185.81,708.1 1200.71,723 1328.74,723 v1(1356,695.74)
  Bottom Layer w5: v1(1356,695.74) 1358.43,698.17 1372.25,698.17 1374.85,700.78 U4.26@1405.47,700.78
PG10: U1.A9 U4.32 | length 562.7
  Top Layer w5: U1.A9@907.45,892.5 908.49,892.5 911.49,889.5 962.99,889.5 963.49,889 981.43,889 1015,889 1132.7,771.3 1159.97,771.3 1167.17,778.5 1185.94,778.5 1190.44,783 1333.84,783 v1(1356,760.84)
  Bottom Layer w5: v1(1356,760.84) 1357.02,759.83 U4.32@1405.47,759.83
PG11: U1.B9 U4.34 | length 596.1
  Top Layer w5: U1.B9@875.95,892.5 886.38,902.93 911.84,902.93 916.77,898 981.43,898 1023,898 1119,802 1153.14,802 1167.64,787.5 1182.21,787.5 1195.71,801 1337.54,801 v1(1356,782.54)
  Bottom Layer w5: v1(1356,782.54) 1356.53,782.02 1372.35,782.02 1374.85,779.52 U4.34@1405.47,779.52
PG12: U1.C9 U4.36 | length 621.3
  Top Layer w5: U1.C9@844.46,892.5 863.39,911.43 915.36,911.43 919.79,907 981.43,907 1033,907 1129,811 1152.72,811 1159.92,818.2 1190.24,818.2 1190.44,818 1342.24,818 v1(1356,804.24)
  Bottom Layer w5: v1(1356,804.24) 1361.04,799.2 U4.36@1405.47,799.2
PG13: U1.D9 U4.30 | length 666.6
  Top Layer w5: U1.D9@812.96,892.5 824.46,881 914.22,881 915.22,880 981.43,880 1004,880 1121.7,762.3 1148.36,762.3 1162.86,747.8 1186.21,747.8 1198.41,760 1335.14,760 v1(1356,739.14)
  Bottom Layer w5: v1(1356,739.14) 1357.01,740.15 U4.30@1405.47,740.15
PG14: U1.D8 U4.28 | length 726
  Top Layer w5: U1.D8@812.96,923.99 812.96,907.25 802.53,896.82 802.53,881.4 807.73,876.2 811.8,876.2 815.5,872.5 910.7,872.5 912.2,871 981.43,871 990,871 1129.4,731.6 1149.16,731.6 1156.36,738.8 1189.94,738.8 1191.14,740 1333.44,740 v1(1356,717.44)
  Bottom Layer w5: v1(1356,717.44) 1356.52,717.96 1372.35,717.96 1374.85,720.46 U4.28@1405.47,720.46
PH4: U1.P3 U5.52 | length 477.8
  Top Layer w5: v1(481.13,1104.74) 483.56,1102.31 483.56,1095.92 U1.P3@498,1081.47
  Bottom Layer w5: U5.52@95.47,956.68 96.15,956 152,956 293.22,1097.22 384.7,1097.22 385.2,1097.72 462.28,1097.72 466.86,1102.31 478.7,1102.31 v1(481.13,1104.74)
PH5: U1.P4 U5.46 | length 493.2
  Top Layer w5: v1(482.25,1066.05) 482.25,1065.89 498,1050.14 U1.P4@498,1049.98
  Bottom Layer w5: U5.46@95.47,897.63 96.1,897 159,897 329,1067 425,1067 441.29,1050.71 454.64,1050.71 455.44,1051.5 465.37,1051.5 479.92,1066.05 v1(482.25,1066.05)
PH6: U1.T11 U5.27 | length 710.8
  Top Layer w5: v1(-46,712.4) 25,783.39 25,794.1 91.9,861 241.98,861 280.28,822.7 280.28,768.28 296.56,752 301.01,752 356.5,807.49 398.25,807.49 399.19,808.44 413.94,808.44 U1.T11@435.01,829.5
  Bottom Layer w5: U5.27@-95.46,720.46 -67.99,720.46 -66.28,718.75 -52.35,718.75 v1(-46,712.4)
PH7: U1.U13 U5.25 | length 671
  Top Layer w5: v1(-46,690.7) 29.48,766.18 29.48,774.67 34,779.18 34,790.37 95.63,852 238.25,852 267,823.25 267,768.83 296.13,739.7 301.44,739.7 309.74,748 314,748 332.51,766.51 U1.U13@403.51,766.51
  Bottom Layer w5: U5.25@-95.46,700.78 -67.99,700.78 -64.27,697.05 -52.35,697.05 v1(-46,690.7)
PI8: U1.E4 U4.39 | length 1149.3
  Top Layer w5: U1.E4@781.46,1049.98 v1@791.06,1059.58
  Layer 3 w5: v1(797.21,1061.68) 783.85,1048.32 772.32,1048.32 753.16,1029.16 693.86,1029.16 669.52,1053.5 663.93,1053.5 661,1056.43 661,1075.08 649,1087.08 649,1147.8 718.2,1217 962.09,1217 1070,1109.09 1070,892.78 1121.08,841.7 1176.15,841.7 v1(1177,842.55)
  Bottom Layer w5: v1(1177,842.55) 1178.99,840.56 1212.55,840.56 U4.39@1214.54,838.57
PI11: U1.F4 U4.37 | length 1055.7
  Top Layer w5: U1.F4@749.97,1049.98 v1@759.14,1059.15
  Layer 3 w5: v1(765.64,1061.58) 751.22,1076 696,1076 686.93,1085.07 663.04,1085.07 657.5,1090.6 657.5,1126.5 682,1151 755,1151 807,1203 963.36,1203 1061,1105.36 1061,887.78 1129.78,819 1135.57,819 1142.92,826.35 v1(1146,826.35)
  Bottom Layer w5: v1(1146,826.35) 1146,818.7 1146.85,817.85 1147.89,818.89 U4.37@1214.54,818.89
PI12: U1.H1 U4.53 | length 744.5
  Top Layer w5: U1.H1@686.98,1144.46 686.98,1157.68 694.15,1164.85 v1(694.15,1168.29)
  Bottom Layer w5: v1(694.15,1168.29) 694.15,1171.73 740.87,1218.44 744.42,1222 989.73,1222 1066.36,1145.36 1066.36,1025.64 1117,975 1213.17,975 U4.53@1214.54,976.37
PI13: U1.H2 U4.55 | length 794.5
  Top Layer w5: U1.H2@686.98,1112.97 686.98,1114.01 692.38,1119.41 692.38,1127.2 v1(694.81,1129.63)
  Bottom Layer w5: v1(694.81,1129.63) 692.38,1132.06 692.38,1145.24 679.3,1158.32 679.3,1174.44 703.58,1198.72 704.29,1198.72 736.57,1231 993.46,1231 1083.46,1141 1083.46,1027.54 1116,995 1213.48,995 U4.55@1214.54,996.05
PI14: U1.H3 U4.57 | length 851.9
  Top Layer w5: U1.H3@686.98,1081.47 696.17,1090.67 702.5,1090.67 v1(704.93,1093.1)
  Bottom Layer w5: v1(704.93,1093.1) 670,1128.03 670,1177.16 732.84,1240 997.18,1240 1094.59,1142.59 1094.59,1030.41 1111,1014 1212.8,1014 U4.57@1214.54,1015.74
PI15: U1.P5 U5.42 | length 486.6
  Top Layer w5: v1(483.24,1036.35) 483.24,1034.28 498,1019.52 U1.P5@498,1018.48
  Bottom Layer w5: U5.42@95.47,858.26 96.73,857 151,857 327.24,1033.24 461.22,1033.24 462.48,1034.5 481.39,1034.5 v1(483.24,1036.35)
PJ0: U1.N6 U5.38 | length 525.2
  Top Layer w5: v1(513.75,1002.73) U1.N6@529.5,986.98
  Bottom Layer w5: U5.38@95.47,818.89 97.59,821 153,821 345,1013 503.48,1013 v1(513.75,1002.73)
PJ1: U1.P6 U5.36 | length 491
  Top Layer w5: v1(482.5,998.15) 485.79,998.15 496.96,986.98 U1.P6@498,986.98
  Bottom Layer w5: U5.36@95.47,799.2 96.88,800.61 125.61,800.61 129,804 129.55,804 129.75,804.2 155.2,804.2 349.15,998.15 404.11,998.15 405.81,999.85 432.19,999.85 433.89,998.15 v1(482.5,998.15)
PJ2: U1.T6 U5.33 | length 626.7
  Top Layer w5: v1(-46,777.5) -45.87,777.63 -29.65,777.63 190.13,997.41 407.83,997.41 411.01,994.23 426.72,994.23 433.96,986.98 U1.T6@435.01,986.98
  Bottom Layer w5: U5.33@-95.46,779.52 -48.01,779.52 v1(-46,777.5)
PJ3: U1.U6 U5.31 | length 596.4
  Top Layer w5: v1(-46,755.8) -33.16,768.63 -25.92,768.63 192.43,986.98 U1.U6@403.51,986.98
  Bottom Layer w5: U5.31@-95.47,759.83 -50.03,759.83 v1(-46,755.8)
PJ4: U1.U7 U5.29 | length 594.2
  Top Layer w5: v1(-46,734.1) 16,796.09 16,797.82 173.66,955.49 329.54,955.49 391.58,955.49 U1.U7@403.51,955.49
  Bottom Layer w5: U5.29@-95.46,740.15 -52.04,740.15 v1(-46,734.1)
PJ5: U1.R12 U5.30 | length 397.6
  Top Layer w5: v1(449.88,782.26) 450.32,782.26 466.06,798.01 U1.R12@466.5,798.01
  Layer 2 w5: v1(155,737) 311,737 329.54,755.54 335,761 428.62,761 v1(449.88,782.26)
  Bottom Layer w5: U5.30@95.47,740.15 113.19,740.15 115.61,737.72 117.82,737.72 118.54,737 v1(155,737)
PJ6: U1.N15 U5.22 | length 451.8
  Top Layer w5: v1(515.25,689.28) U1.N15@529.5,703.52
  Layer 2 w5: v1(154,661) 310.99,661 321.99,672 497.98,672 v1(515.25,689.28)
  Bottom Layer w5: U5.22@95.47,661.41 95.68,661.2 153.8,661.2 v1(154,661)
PJ7: U1.N14 U5.24 | length 456.4
  Top Layer w5: v1(516.13,722.28) 516.44,722.28 529.18,735.02 U1.N14@529.5,735.02
  Layer 2 w5: v1(135,682) 340,682 361,703 496.85,703 v1(516.13,722.28)
  Bottom Layer w5: U5.24@95.47,681.09 134.09,681.09 v1(135,682)
PJ8: U1.N13 U5.26 | length 462.1
  Top Layer w5: v1(513.75,749.26) 513.75,750.01 529.5,765.76 U1.N13@529.5,766.51
  Layer 2 w5: v1(154,702) 329.54,702 330,702 350.8,722.8 429.67,722.8 441.93,735.06 499.54,735.06 v1(513.75,749.26)
  Bottom Layer w5: U5.26@95.47,700.78 152.78,700.78 v1(154,702)
PJ9: U1.M14 U5.20 | length 546.3
  Top Layer w5: v1@546.53,720.55 U1.M14@560.99,735.02
  Layer 2 w5: v1(135,645) 135.65,645.65 329.54,645.65 342.35,645.65 349.5,638.5 426.74,638.5 428.24,640 535,640 540.3,645.3 v1(540.3,718.45)
  Bottom Layer w5: U5.20@95.47,641.72 106.58,641.72 109,644.15 109,645 v1(135,645)
PJ10: U1.L14 U5.16 | length 604.8
  Top Layer w5: v1(580.46,723.52) 580.73,723.52 592.22,735.02 U1.L14@592.49,735.02
  Layer 2 w5: v1(135,605) 137,607 235,607 257,585 480,585 517,622 538,622 580.46,664.46 v1(580.46,723.52)
  Bottom Layer w5: U5.16@95.47,602.35 96.79,603.68 133.68,603.68 v1(135,605)
PJ11: U1.K14 U5.14 | length 655.5
  Top Layer w5: v1(603.48,720.23) 605.59,722.33 611.3,722.33 U1.K14@623.98,735.02
  Layer 2 w5: v1(154,584) 231.45,584 240.45,575 329.54,575 495,575 523.5,603.5 531.52,603.5 560.02,632 591,632 618,659 618,705.71 v1(603.48,720.23)
  Bottom Layer w5: U5.14@95.47,582.67 96.14,583.33 153.33,583.33 v1(154,584)
PJ12: U1.D11 U4.16 | length 714.9
  Top Layer w5: U1.D11@812.96,829.5 833.46,809 942.33,809 1124.65,626.68 1124.65,620.69 1133.64,611.7 1154.41,611.7 1162.41,619.7 1192.14,619.7 1199.44,627 1288,627 1325,590 1337.4,590 1339.65,587.75 1343.08,587.75 1345.16,589.84 1358.6,589.84 v1(1361.03,592.27)
  Bottom Layer w5: v1(1361.03,592.27) 1363.98,592.27 1374.07,602.35 U4.16@1405.47,602.35
PJ13: U1.E10 U4.31 | length 475.7
  Top Layer w5: U1.E10@781.46,861 v1(797.21,845.25)
  Layer 2 w5: v1(797.21,845.25) 828.46,814 1021,814 1072.7,762.3 1176.15,762.3 v1(1177,763.15)
  Bottom Layer w5: v1(1177,763.15) 1178.66,761.49 1212.87,761.49 U4.31@1214.53,759.83
PJ14: U1.D10 U4.33 | length 437.5
  Top Layer w5: U1.D10@812.96,861 v1(828.71,845.25)
  Layer 2 w5: v1(828.71,845.25) 850.96,823 1042,823 1081,784 1126.15,784 1128.65,786.5 1144.85,786.5 v1(1145,786.65)
  Bottom Layer w5: v1(1145,786.65) 1147.43,784.22 1159.15,784.22 1163.85,779.52 U4.33@1214.54,779.52
PJ15: U1.B10 U4.24 | length 619.6
  Top Layer w5: U1.B10@875.95,861 888.32,848.63 972.64,848.63 1129.37,691.9 1160.72,691.9 1167.92,699.1 1189.54,699.1 1194.08,703.64 1326.4,703.64 v1(1356,674.04)
  Bottom Layer w5: v1(1356,674.04) 1358.43,676.47 1370.94,676.47 1374.85,680.39 1376.3,680.39 1377,681.09 U4.24@1405.47,681.09
PK0: U1.J14 U5.12 | length 690.7
  Top Layer w5: U1.J14@655.48,735.02 655.48,734.17 669.53,720.12 v1(669.53,719.27)
  Layer 2 w5: v1(136,565) 137,566 503.92,566 532.67,594.75 534.79,594.75 563.54,623.5 625.5,623.5 655,653 655,704.74 v1(669.53,719.27)
  Bottom Layer w5: U5.12@95.47,562.98 96.48,563.99 134.99,563.99 v1(136,565)
PK1: U1.J15 U5.10 | length 702.1
  Top Layer w5: U1.J15@655.48,703.52 655.48,702.77 669.85,688.4 v1(669.85,687.65)
  Layer 2 w5: v1(155,542) 170,557 507.65,557 536.65,586 538.06,586 567.06,615 653,615 684.7,646.7 684.7,669.16 681.36,672.5 681.36,676.04 669.85,687.55 v1(669.85,687.65)
  Bottom Layer w5: U5.10@95.47,543.3 96.12,542.65 154.35,542.65 v1(155,542)
PK2: U1.H17 U5.6 | length 676
  Top Layer w5: U1.H17@686.98,640.53 v1@700.36,627.14
  Layer 2 w5: v1(155.5,501.5) 193,539 515.1,539 573.1,597 679.47,597 v1(702.47,620)
  Bottom Layer w5: U5.6@95.47,503.93 153.07,503.93 v1(155.5,501.5)
PK3: U1.C8 U4.42 | length 621.1
  Top Layer w5: U1.C8@844.46,923.99 865.52,945.06 880.85,945.06 884.33,948.53 899.66,948.53 905.27,942.92 919.93,942.92 922.75,940.1 980.93,940.1 981.43,940.6 1046.94,940.6 1106.14,881.4 1153.4,881.4 1168,896 1194,896 1211,879 1342.91,879 1352.57,869.34 v1(1356,869.34)
  Bottom Layer w5: v1(1356,869.34) 1359.44,869.34 1367.81,860.97 1374.29,860.97 1377,858.26 U4.42@1405.47,858.26
PK4: U1.B8 U4.40 | length 581.2
  Top Layer w5: U1.B8@875.95,923.99 886.38,934.42 916.41,934.42 925.83,925 981.43,925 1049.82,925 1124.12,850.7 1154.98,850.7 1162.18,857.9 1192.34,857.9 1194.44,860 1343.64,860 v1(1356,847.64)
  Bottom Layer w5: v1(1356,847.64) 1362.35,841.29 1374.28,841.29 1377,838.57 U4.40@1405.47,838.57
PK5: U1.A8 U4.38 | length 553
  Top Layer w5: U1.A8@907.45,923.99 908.19,923.25 915.55,923.25 922.81,916 981.43,916 1041,916 1115.3,841.7 1152.59,841.7 1167.09,827.2 1186.91,827.2 1200.71,841 1340.94,841 v1(1356,825.94)
  Bottom Layer w5: v1(1356,825.94) 1362.35,819.59 1376.3,819.59 1377,818.89 U4.38@1405.47,818.89
PK6: U1.C7 U4.46 | length 609.6
  Top Layer w5: U1.C7@844.46,955.49 845.5,955.49 852.41,962.4 857.77,962.4 v1(859.88,964.5) 871.93,976.56 885.96,976.56 889.25,979.84 898.87,979.84 902.15,976.56 913.68,976.56 917.33,980.2 981.2,980.2 989.4,972 1041,972 1066,947 1296,947 1332,911 1354.26,911 v1(1356,912.74)
  Bottom Layer w5: v1(1356,912.74) 1371.12,897.63 U4.46@1405.47,897.63
PK7: U1.D7 U4.47 | length 1323.7
  Top Layer w5: U1.D7@812.96,955.49 812.96,956.53 820.89,964.47 v1(820.89,967.42)
  Layer 3 w5: v1(820.89,967.42) 820.89,967.23 807.66,954 783,954 753,924 672,924 627,969 627,1061 615,1073 615,1164 711,1260 970,1260 1106,1124 1106,975.41 1166.31,915.11 1180.06,915.11 1180.06,918.7 v1(1180.06,920.1)
  Bottom Layer w5: v1(1180.06,920.1) 1180.06,918.7 1180.06,917.31 1181.16,916.21 1213.43,916.21 U4.47@1214.54,917.31
"QSPI_BK1_IO0 / PF8": U1.K4 U3.5 | length 681.4
  Top Layer w5: v1(602.81,1064.52) 604.8,1062.53 611.43,1062.53 U1.K4@623.98,1049.98
  Bottom Layer w5: v1(244,1385) 547.73,1385 575.24,1357.49 575.24,1244.76 589.36,1230.64 589.36,1224.36 611.5,1202.23 611.5,1088.46 608.24,1085.2 608.24,1084.57 604.54,1080.87 604.54,1066.25 v1(602.81,1064.52)
"QSPI_BK1_IO1 / PF9": U1.L4 U3.2 | length 643.4
  Top Layer w5: v1(576.74,1065.72) U1.L4@592.49,1049.98
  Bottom Layer w5: v1@551,1280.65 v1(549.65,1282) 549.65,1310.04 554,1314.39 554,1339 529.07,1363.93 449.93,1363.93 447,1366.86 447,1371 452,1376 535,1376 565,1346 565,1336 566.24,1334.76 566.24,1234.76 601,1200 601,1089.98 v1(576.74,1065.72)
"QSPI_BK1_IO2 / PF7": U1.K3 U3.3 | length 656.2
  Top Layer w5: v1(507,1191.85) 507,1190 517,1180 589.88,1180 602.92,1166.96 602.92,1119.29 613.79,1108.41 613.79,1091.66 U1.K3@623.98,1081.47
  Bottom Layer w5: v1(507,1191.85) 507,1218.44 507,1220.94 ccw(c501,1220.94) 501,1226.94 488,1226.94 cw(c488,1232.94) 488,1238.94 536,1238.94 ccw(c536,1244.94) 536,1250.94 488,1250.94 cw(c488,1256.94) 488,1262.94 529,1262.94 ccw(c529,1268.94) 529,1274.94 488,1274.94 cw(c488,1280.94) 488,1286.94 526.87,1286.94 ccw(c526.87,1292.94) 526.87,1298.94 513,1298.94 cw(c513,1304.94) 507,1304.94 507,1319 517,1329 v1(538.65,1329)
"QSPI_BK1_IO3 / PF6": U1.K2 U3.7 | length 722.3
  Top Layer w5: U3.7@252.79,1279 275.82,1255.96 275.82,1251.18 320,1207 338,1207 352.5,1207 cw(c352.5,1201) 358.5,1201 358.5,1183 ccw(c364.5,1183) 370.5,1183 370.5,1208.35 cw(c376.5,1208.35) 382.5,1208.35 382.5,1189.92 ccw(c388.5,1189.92) 394.5,1189.92 394.5,1208.35 cw(c400.5,1208.35) 406.5,1208.35 406.5,1198.21 ccw(c412.5,1198.21) 418.5,1198.21 418.5,1208.35 cw(c424.5,1208.35) 430.5,1208.35 430.5,1198.21 ccw(c436.5,1198.21) 442.5,1198.21 442.5,1208.35 cw(c448.5,1208.35) 454.5,1208.35 454.5,1198.21 ccw(c460.5,1198.21) 466.5,1198.21 466.5,1208.35 cw(c472.5,1208.35) 478.5,1208.35 478.5,1189.7 ccw(c484.5,1189.7) 490.5,1189.7 490.5,1201 cw(c496.5,1201) 496.5,1207 507,1207 515.98,1207 527.98,1195 586.9,1195 611.42,1170.48 611.42,1125.54 U1.K2@623.98,1112.97
"QSPI_BK1_NCS / PG6": U1.G15 U3.1 | length 733.8
  Top Layer w5: U3.1@548,1232 552.41,1236.41 590.59,1236.41 631,1196 631,1156.42 634.41,1153 634.41,1083.9 641,1077.31 641,1018.21 651.16,1008.05 666.16,1008.05 666.85,1008.74 679.15,1008.74 681.41,1006.48 685,1006.48 700.52,990.96 744.04,990.96 751,984 751,791 733,773 733,764.07 723.44,754.51 723.22,754.51 708,739.29 708,730.74 718.47,720.27 U1.G15@718.47,703.52 719.52,703.52 732.85,690.19 v1(735.72,690.19)
"QSPI_CLK / PF10": U1.L3 U3.6 | length 666.4
  Top Layer w5: v1(576.74,1097.22) U1.L3@592.49,1081.47
  Bottom Layer w5: v1(243,1332) 290,1332 292.5,1332 ccw(c292.5,1338) 298.5,1338 298.5,1346 cw(c304.5,1346) 310.5,1346 310.5,1323.19 ccw(c316.5,1323.19) 322.5,1323.19 322.5,1326 cw(c328.5,1326) 328.5,1332 413,1332 436,1332 473,1295 473,1197 493,1177 521,1177 546.49,1202.49 586.49,1202.49 592.5,1196.48 592.5,1112.98 v1(576.74,1097.22)
RST: C28.1 Q1.3 R2.1 SW2.1 U1.K1 U4.3 | length 2614.7
  Top Layer w5: SW2.1@155,1380.59 203.81,1380.59 234.22,1411 v1(437.86,1411) ; Q1.3@593,1493 601.69,1493 611,1483.69 R2.1@611,1443.73 ; R2.1@602.93,1435.66 558.66,1435.66 503,1380 503,1233 529,1207 586.92,1207 619.92,1174 619.92,1148.53 620.72,1147.72
  Layer 3 w5: v1(518.28,1505.74) 542,1482.02 v1(542,1421)
  Bottom Layer w5: v1(437.86,1411) 532,1411 v1(542,1421) ; C28.1@514,1507.72 518.28,1507.72 v1(518.28,1505.74) ; v1(606,1442) 635.5,1412.5 666.5,1412.5 696,1383 784.41,1383 829.64,1337.77 1056.96,1337.77 1090.65,1304.08 1090.65,1292.64 1167.71,1215.59 1183.14,1215.59 1260.19,1138.53 1260.19,1087.86 1268,1080.05 1268,481.27 1239.86,453.14 1189.2,453.14 1185.39,456.94 1185.39,472.17 1189.69,476.47 1189.69,477.12 1196.82,484.24 U4.3@1214.53,484.24 U4.3@1232.25,484.24
"SWCLK / PA14": JP1.4 U1.B14 U4.7 | length 689.1
  Top Layer w5: U1.B14@875.95,735.02 892.7,735.02 903.13,724.59 920.19,724.59 970.85,673.93 970.85,673.73 1021.51,623.07 1021.51,589.23 1127.73,483 1156.29,483 v1(1156.65,483.35) 1267.96,372.04 1267.96,324.22 JP1.4@1270.69,321.48
  Bottom Layer w5: v1(1156.65,483.35) 1156.65,483.77 1184.97,512.1 1185.3,512.1 1196.82,523.61 U4.7@1214.53,523.61
"SWDIO / PA13": JP1.5 U1.C15 U4.5 | length 665.9
  Top Layer w5: U1.C15@844.46,703.52 845.44,703.52 859.22,689.75 v1(860.2,689.75) ; v1(950,668) 996,622 996,602 1137,461 v1(1156,461) 1238.35,378.65 1238.35,344.28 JP1.5@1228.59,334.52
  Layer 2 w5: v1(860.2,689.75) 901,689.75 910.35,680.4 937.6,680.4 v1(950,668)
  Bottom Layer w5: v1(1156,461) 1181,486 1181,488.11 1196.82,503.93 U4.5@1214.53,503.93
VBAT: C39.1 D2.3 U1.B1 | length 859.3
  Top Layer w12: D2.3@390,1544.34 v1(390,1552) ; U1.B1@875.95,1144.46 887,1155.51 v1(887,1163)
  Layer 4 w12: v1(390,1552) 390,1416.23 386,1412.23 386,1278 415,1249 654,1249 673,1230 753,1230 794,1189 861,1189 v1(887,1163)
  Bottom Layer w12: v1(390,1552) C39.1@393,1555
VBAT-EXT: D2.1 U5.60 | length 676.5
  Top Layer w12: v1(81,1090) 81,1415 127.66,1461.66 D2.1@352.6,1461.66
  Bottom Layer w12: v1(81,1090) 81,1088.46 95.47,1073.99 U5.60@95.47,1035.42
VDDA: C35.2 C36.2 FB1.2 R8.1 U1.L1 | length 593.6
  Top Layer w8.86: v1(573.4,1158.75) 575.79,1158.75 590.07,1144.46 U1.L1@592.49,1144.46
  Top Layer w12: C35.2@672.54,1595 670.54,1597 v1(669,1597) 670.5,1598.5 721.5,1598.5 FB1.2@727,1593 ; FB1.2@727.46,1598 v1(740,1598)
  Layer 3 w12: v1(573.4,1158.75) 573.4,1454.4 624,1505 v1(624,1561)
  Bottom Layer w12: v1(624,1561) 624,1570.28 C36.2@651.72,1598 652.22,1597.5 668.5,1597.5 v1(669,1597) ; v1(740,1598) R8.1@741,1599
VREF: C37.2 C38.2 R8.2 U1.M1 U5.59 | length 1564.9
  Top Layer w8.86: v1(543.7,1160.21) 545.24,1160.21 U1.M1@560.99,1144.46
  Top Layer w12: C37.2@507,1599 v1(508,1600)
  Layer 3 w12: v1(-95.46,1130.46) -56.93,1169 313,1169 398,1254 489,1254 ; v1(508,1600) 463,1555 463,1499 489,1473 489,1254 ; v1(543.7,1160.21) 543.7,1199.3 489,1254
  Bottom Layer w12: U5.59@-95.46,1035.42 v1(-95.46,1130.46) ; v1(508,1600) C38.2@511.28,1600 551.78,1559.5 600.94,1559.5 605.15,1555.29 605.15,1553.19 616.19,1542.15 631.81,1542.15 634.66,1545 668.27,1545 692.27,1569 745.09,1569 763.4,1587.31 763.4,1587.67 R8.2@775.73,1600
pads on no net: *1.1 *2.1 *3.1 *4.1 JP1.0 U1.E1 U1.F1 U1.G2 U1.K16 U1.K17 U1.L16 U1.L17 U1.M16 U1.M17 U1.N17 U2.E3 U2.E7 U2.H3 U2.H7 U2.K2 U2.K3 U4. U5. U6.1 U6.4 U6.5 U6.9 U6.10 U6.11 U6.12 U6.13 U6.14 U6.15 U6.16 U6.17

## Polygon pours and split planes (outlines as drawn)
+3.3 on Layer 2 "+3.3_L02_P002" (solid, remove dead copper, pour order 2): -169.98,1677.25 1479.98,1677.25 1479.98,-176 1479.98,-177.25 -169.98,-177.25
+5 on Layer 2 "+5_L02_P001" (solid, remove dead copper, pour order 1): -130,459 -35,459 -1,493 -1,1278 99,1378 875,1378 922,1425 922,1477 909,1490 902,1483 -42,1483 -132,1393
GND on Top Layer "GND_L01_P005" (solid, remove dead copper, pour order 5): -169.98,1677.25 1479.98,1677.25 1479.98,-176 1479.98,-177.25 -169.98,-177.25
+3.3 on Top Layer "+3.3_L01_P003" (solid, remove dead copper, pour order 3): 926,1410 921,1405 921,1342 971,1342 1052,1423 1134,1423 1171,1460 1171,1541 1145,1541 1136,1550 1042,1550 1021,1529 1021,1470 1005,1454 978,1454 978,1430 960,1412 942,1412
GND on Bottom Layer "GND_L06_P008" (solid, remove dead copper, pour order 8): -169.98,1677.25 1479.98,1677.25 1479.98,-176 1479.98,-177.25 -169.98,-177.25
GND on Layer 4 "GND_L04_P007" (solid, remove dead copper, pour order 7): -169.98,1677.25 1479.98,1677.25 1479.98,-176 1479.98,-177.25 -169.98,-177.25
GND on Layer 3 "GND_L03_P006" (solid, remove dead copper, pour order 6): -169.98,1685.72 1479.98,1685.72 1479.98,-167.53 1479.98,-177.25 -169.98,-177.25
GND on Layer 5 "GND_L05_P000" (solid, remove dead copper, pour order 0): -169.98,1677.25 1479.98,1678 1479.98,-177.25 -174.87,-182.13

## Other copper
Top Layer:
  rectangle net +3.3: 930,1352 1018,1416
  rectangle net +5: 762,1398 828.84,1456
  pour cut-out: 93,1416 77,1400 77,837 183,837 268,752 268,261 371,158 371,72 460,72 546,-14 559,-1 823,-1 1071,247 1395,247 1395,450 866,979 866,1200 895,1200 970,1275 1027,1275 1089,1337 1067,1359 946,1359 793,1512 215,1512
Layer 3:
  pour cut-out: 210.46,1013.54 210.46,215.54 345,81 585,81 643,23 873,23 936,86 936,550 1038,652 1031,659 1031,1140 916,1140 807,1249 746,1188 389,1188 316,1115 316,1087 257,1087 227,1057
Layer 4:
  pour cut-out: 267,757 259,749 259,215 477,-3 801,-3 845,41 845,96 981,232 981,1091 851,1221 430,1221 174,965 174,806
Bottom Layer:
  pour cut-out: 217,911 217,144 293,68 386,68 386,-2.48 466.52,-83 802,-83 1030,145 1030,859 1135,964 1223,964 1223,1040.33 1259,1076.33 1256,1079.33 1256,1150 1249,1150 823.71,1575.29 359.26,1575.29 211.11,1427.13 211.11,1042.11

## Silkscreen, mask and mechanical layers (free items; w line width, h text height)
Top Overlay:
  drawing of 86 lines, arcs and shapes, not listed
  text "BOOT" at 334,1637 h20
  text "FLASH" at 203,1445 h20
  text "RST" at 74,1255 h20 r90
  text "CPU" at 369,1077 h20 r90
  text "STM32 H750" at 19,830 h60 r270
  text "+3.3" at 1320,433 h20 r90
  text "SWCLK" at 1276,374 h20 r90
  text "GND" at 1395,374 h20 r90
  text "+5" at 1357,373 h20 r90
  text "TX" at 1158,372 h20 r90
  text "SWDIO" at 1236,372 h20 r90
  text "RX" at 1197,371 h20 r90
  text "SDRAM" at 344,366 h20
Mechanical 1:
  the board outline again, w10